# EAGLE board pcb final (EAGLE 9.7.0)
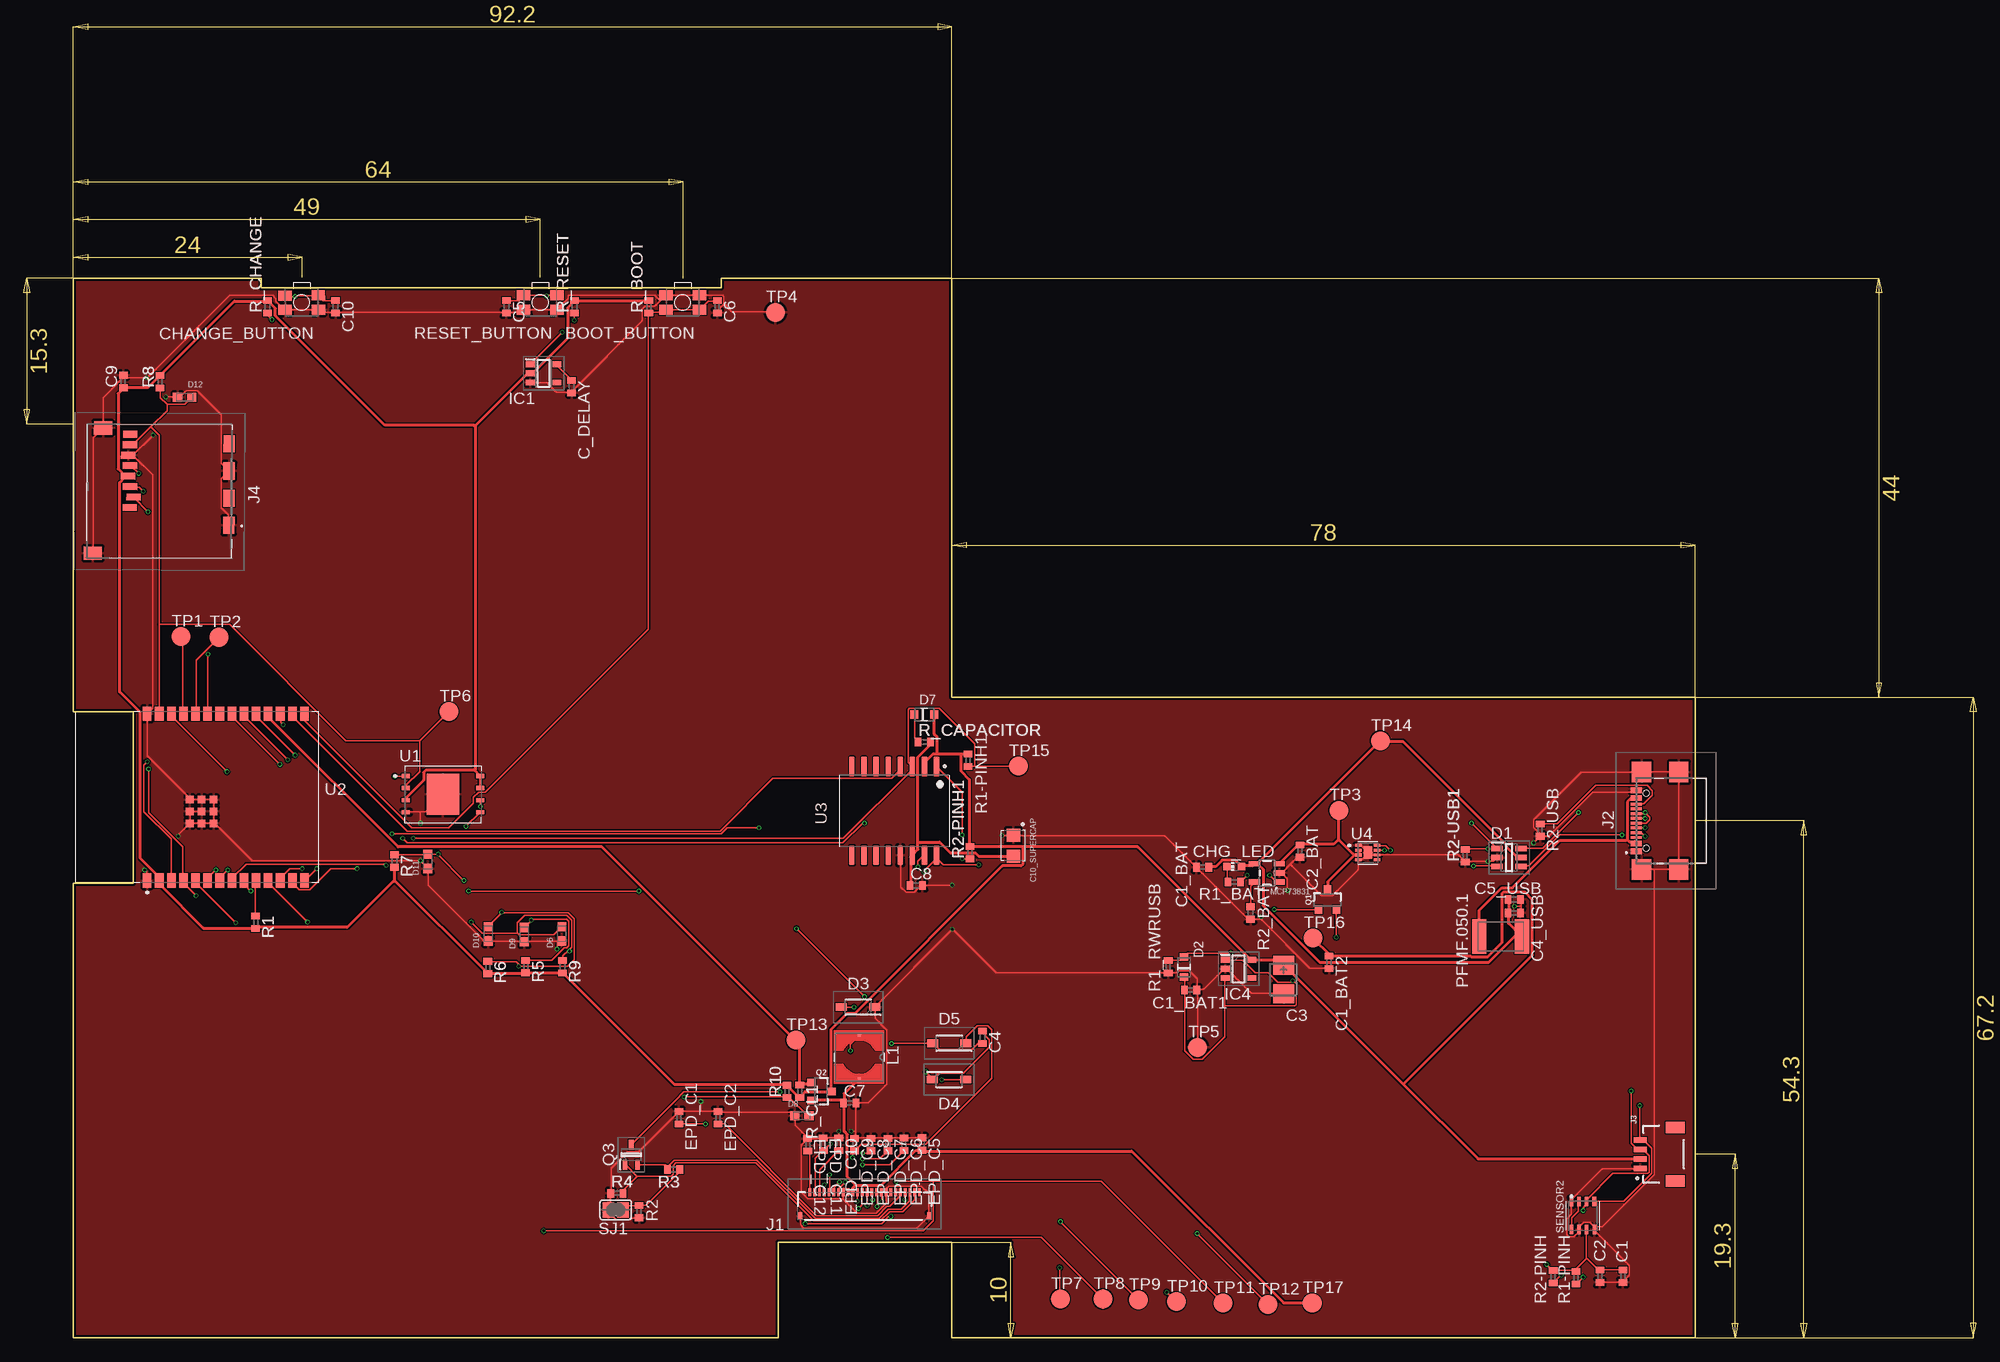
[diagram p0: board, top side]
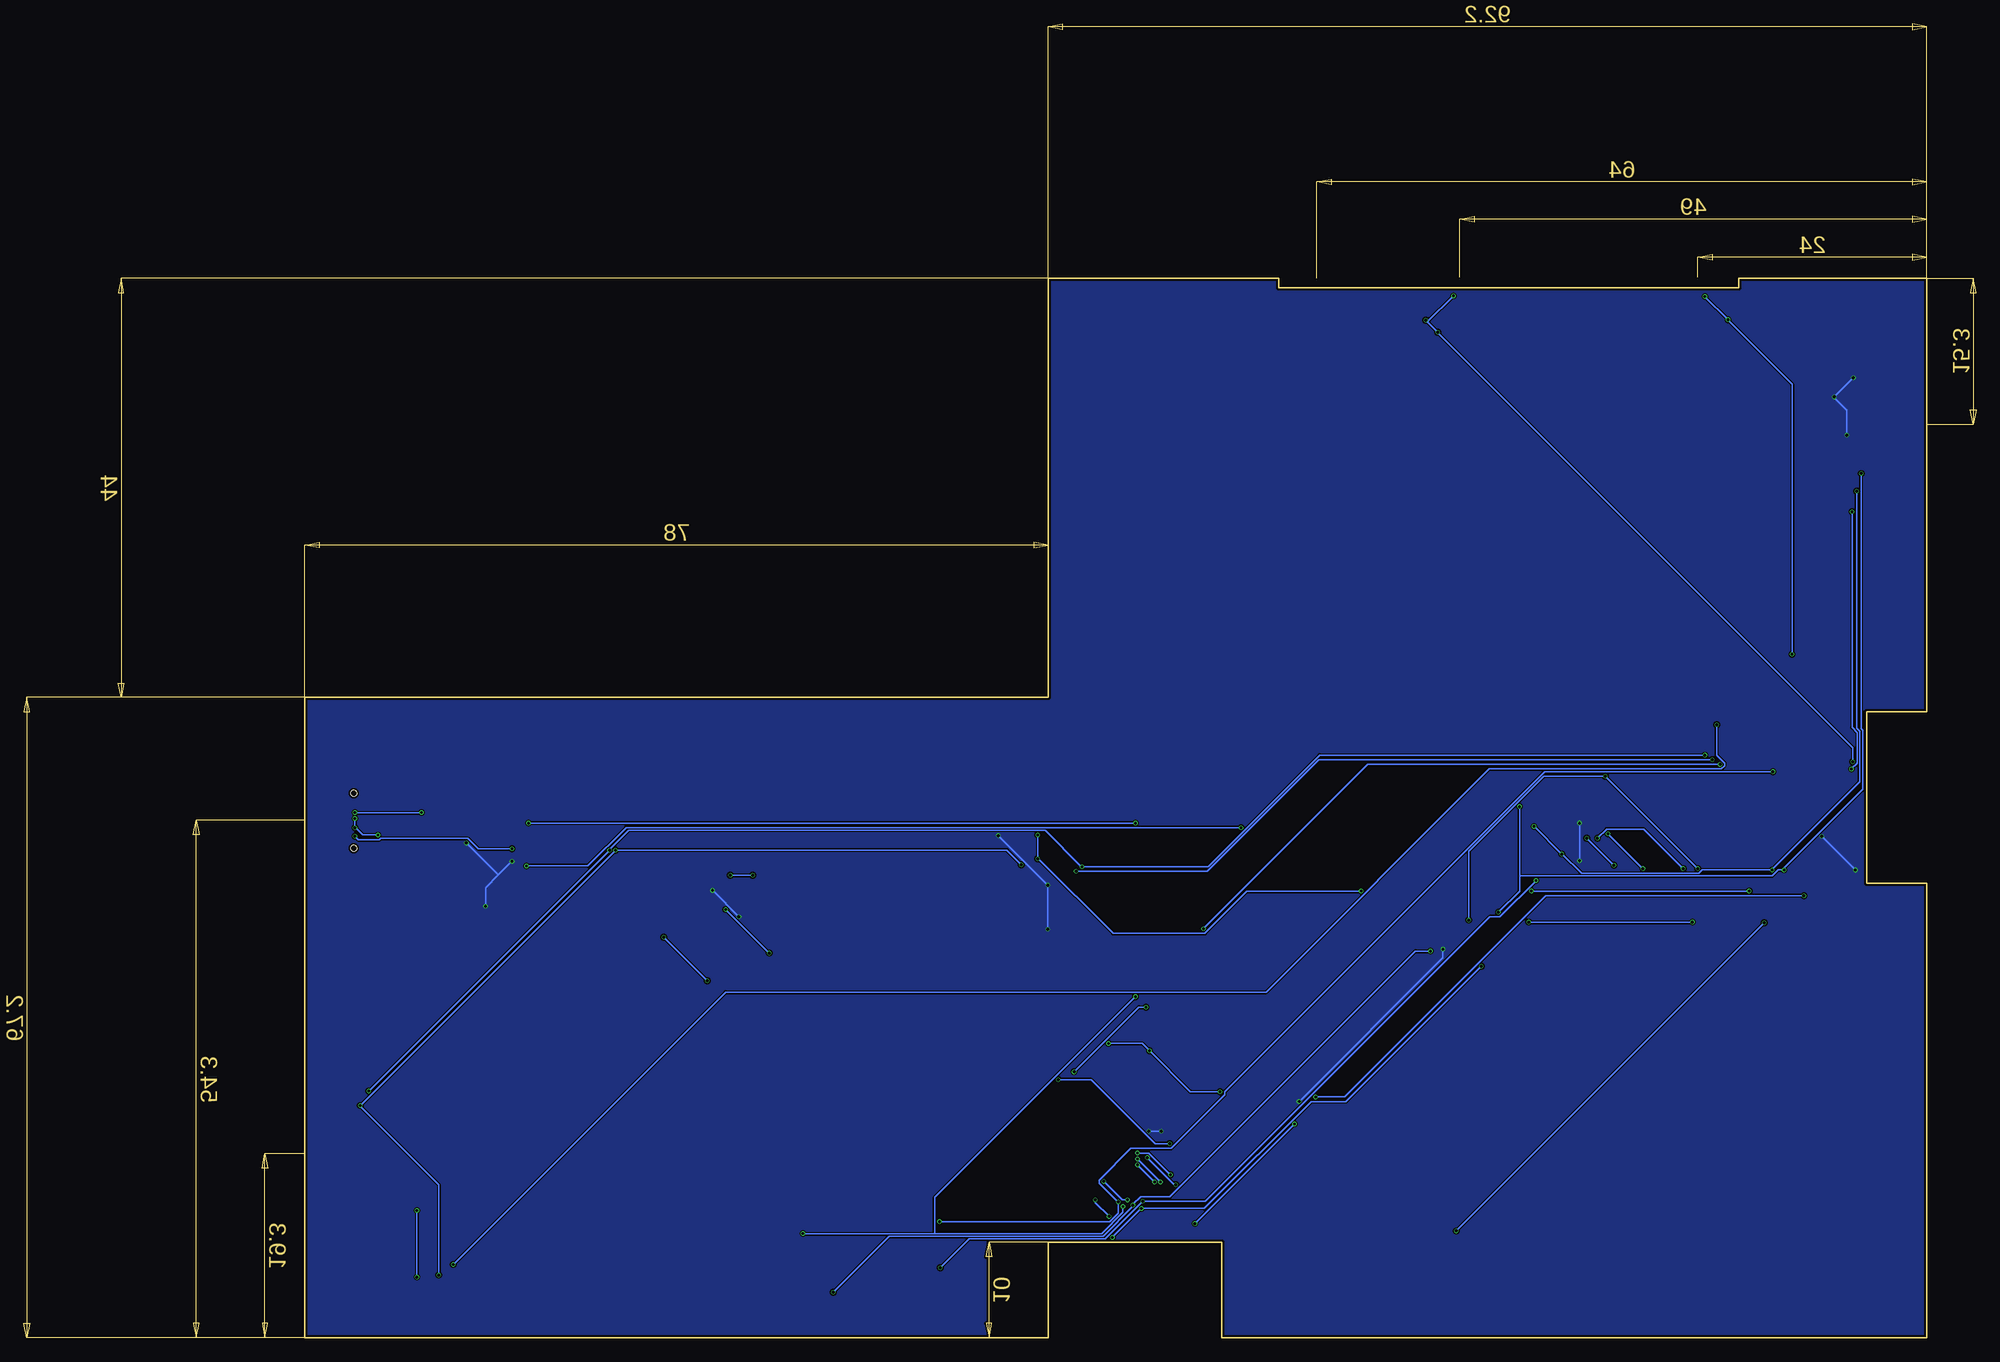
[diagram p1: board, bottom side, seen from below]

Size 170.2 x 111.2 mm. Coordinates in mm from the lower left corner, seen from the top.
Outline: 92.2,111.2 92.2,67.2 170.2,67.2 170.2,0 92.2,0 92.2,10 74,10 74,0 0,0 0,47.7 6.3,47.7 6.3,65.7 0,65.7 0,111.2 19.7,111.2 19.7,110.2 68,110.2 68,111.2 92.2,111.2
Copper layers (1*16): Top 0.035mm / dielectric 1.6mm / Bottom 0.035mm
Design rules "jlcpcb-2layers.dru": minimum track width 5mil, minimum drill 0.3mm, track to track 5mil, track to pad 5mil, pad to pad 5mil, via to via 5mil, smd to smd 5mil, copper to edge 0.2mm, drill to drill 6mil, minimum pad ring 10mil, minimum via ring 3mil, stop-mask expansion 4mil, vias tented up to drill 0mil, thermal gap 10mil
Net classes: 0 default: width 0.15 mm; 1 power nets: width 0.3 mm

## Footprints (pad centres in the part's own frame; a part is rotated, then mirrored left to right if it is on the bottom)
MYBUTTON = smd 1.4 x 1.05: 1 1.75,0.75; 2 -1.75,0.75; 3 -1.75,-0.75; 4 1.75,-0.75
EAGLE-LTSPICE_C0402 = smd 0.7 x 0.9: 1 -0.65,0; 2 0.65,0
RCL_CT3528 = smd 2 x 2.2: + -1.5,0; - 1.5,0
CAPCP3225X100N = smd 1.4 x 1.4: 1 -1.1,0; 2 1.1,0
ADAFRUIT_CHIP-LED0603 = smd 0.8 x 0.8: A 0,-0.75; C 0,0.75
SOT95P280X145-6N = smd 1.2 x 0.6: 1 -1.25,0.95; 2 -1.25,0; 3 -1.25,-0.95; 4 1.25,-0.95; 5 1.25,0; 6 1.25,0.95
ESP32_WROVER_AVX---SD0805S020S1R0_AVX_SD0805S020S1R0_0 = smd 0.8 x 0.9: 1 -1.05,0; 2 1.05,0
SOD3716X135N = smd 1.15 x 0.8: 1 -1.75,0; 2 1.75,0
DIOC1608X36N = smd 0.97 x 0.94: 1 -0.75,0; 2 0.75,0
SOT95P280X125-5N = smd 0.9 x 0.6: 1 -1.4,0.95; 2 -1.4,0; 3 -1.4,-0.95; 4 1.4,-0.95; 5 1.4,0.95
SOT95P280X120-5N = smd 0.9 x 0.6: 1 -1.4,0.95; 2 -1.4,0; 3 -1.4,-0.95; 4 1.4,-0.95; 5 1.4,0.95
FH34SRJ24S05SH99 = smd 0.3 x 0.8: 1 5.75,1.45; 2 5.25,1.45; 3 4.75,1.45; 4 4.25,1.45; 5 3.75,1.45; 6 3.25,1.45; 7 2.75,1.45; 8 2.25,1.45; 9 1.75,1.45; 10 1.25,1.45; 11 0.75,1.45; 12 0.25,1.45; 13 -0.25,1.45; 14 -0.75,1.45; 15 -1.25,1.45; 16 -1.75,1.45; 17 -2.25,1.45; 18 -2.75,1.45; 19 -3.25,1.45; 20 -3.75,1.45; 21 -4.25,1.45; 22 -4.75,1.45; 23 -5.25,1.45; 24 -5.75,1.45 | smd 0.4 x 0.8: MP1 6.75,-1.05; MP2 -6.75,-1.05
SAMACSYS_PARTS_USB4110GFA = smd 0.3 x 1.15: A1 -3.35,3.678; A4 -2.55,3.678; A5 -1.25,3.678; A6 -0.25,3.678; A7 0.25,3.678; A8 1.25,3.678; A9 2.55,3.678; A12 3.35,3.678; B1 3.05,3.678; B4 2.25,3.678; B5 1.75,3.678; B6 0.75,3.678; B7 -0.75,3.678; B8 -1.75,3.678; B9 -2.25,3.678; B12 -3.05,3.678 | smd 2.18 x 2: MP1 -5.11,-0.827; MP2 5.11,-0.827; MP3 -5.11,3.103; MP4 5.11,3.103 | hole 0.65: -2.89,2.603; 2.89,2.603
JST04_1MM_RA = smd 0.6 x 1.35: 1 -1.5,0; 2 -0.5,0; 3 0.5,0; 4 1.5,0 | smd 1.2 x 2: NC1 2.8,-3.675; NC2 -2.8,-3.675
112ATAARR03ATTEND = smd 1.8 x 1.2: G1 10.6,10.4; G2 4.9,10.4; S1 7.75,10.4; S2 2.05,10.4 | smd 1.4 x 1.9: G3 13.6,-3.85; G4 0.45,-2.85 | smd 0.7 x 1.5: P1 8.8,0; P2 7.7,0.4; P3 6.6,0; P4 5.5,-0.2; P5 4.4,0; P6 3.3,-0.2; P7 2.2,0; P8 1.1,0
IND_4828-WE-TPC_WRE = smd 0.33 x 0.33: 1 -2.286,0; 2 2.286,0
ESP32_WROVER_SPARKFUN-IC-POWER_SOT23-5 = smd 0.55 x 1.2: 1 -0.95,-1.3; 2 0,-1.3; 3 0.95,-1.3; 4 0.95,1.3; 5 -0.95,1.3
ESP32C6_VARISTOR_CT/CN1812 = smd 1.5 x 3.6: 1 -2.25,0; 2 2.25,0
ESP32_WROVER_SPARKFUN-DISCRETESEMI_SOT23-3 = smd 0.8 x 0.9: 1 -0.95,-1; 2 0.95,-1; 3 0,1.1
SOT65P210X110-3N = smd 1.05 x 0.5: 1 -1.05,0.65; 2 -1.05,-0.65; 3 1.05,0
ESP32_WROVER_EAGLE-LTSPICE_R0402 = smd 0.7 x 0.9: 1 -0.65,0; 2 0.65,0
ESP32_WROVER_BME680_PSON80P300X300X100-8N = smd 1.016 x 0.5: 1 1.458,1.2; 2 1.458,0.4; 3 1.458,-0.4; 4 1.458,-1.2; 5 -1.458,-1.22; 6 -1.458,-0.4; 7 -1.458,0.4; 8 -1.458,1.2
SJ = smd 1.168 x 1.6: 1 -0.762,0; 2 0.762,0
TP20R = smd 2 x 2: TP 0,0
SON127P600X800X80-9N = smd 0.94 x 0.44: 1 -3.895,1.905; 2 -3.895,0.635; 3 -3.895,-0.635; 4 -3.895,-1.905; 5 3.895,-1.905; 6 3.895,-0.635; 7 3.895,0.635; 8 3.895,1.905 | smd 3.4 x 4.3: 9 0,0
XCVR_ESP32-C6-WROOM-1-N8 = smd 1.5 x 0.9: 1 -8.75,5.26; 2 -8.75,3.99; 3 -8.75,2.72; 4 -8.75,1.45; 5 -8.75,0.18; 6 -8.75,-1.09; 7 -8.75,-2.36; 8 -8.75,-3.63; 9 -8.75,-4.9; 10 -8.75,-6.17; 11 -8.75,-7.44; 12 -8.75,-8.71; 13 -8.75,-9.98; 14 -8.75,-11.25; 15 8.75,-11.25; 16 8.75,-9.98; 17 8.75,-8.71; 18 8.75,-7.44; 19 8.75,-6.17; 20 8.75,-4.9; 21 8.75,-3.63; 22 8.75,-2.36; 23 8.75,-1.09; 24 8.75,0.18; 25 8.75,1.45; 26 8.75,2.72; 27 8.75,3.99; 28 8.75,5.26 | smd 0.8 x 0.8: 29_1 -2.755,0.79; 29_2 -1.505,0.79; 29_3 -0.255,0.79; 29_4 -2.755,-0.46; 29_5 -1.505,-0.46; 29_6 -0.255,-0.46; 29_7 -2.755,-1.71; 29_8 -1.505,-1.71; 29_9 -0.255,-1.71
SOIC127P1032X265-16N = smd 2.05 x 0.59: 1 -4.655,4.445; 2 -4.655,3.175; 3 -4.655,1.905; 4 -4.655,0.635; 5 -4.655,-0.635; 6 -4.655,-1.905; 7 -4.655,-3.175; 8 -4.655,-4.445; 9 4.655,-4.445; 10 4.655,-3.175; 11 4.655,-1.905; 12 4.655,-0.635; 13 4.655,0.635; 14 4.655,1.905; 15 4.655,3.175; 16 4.655,4.445
SON50P200X200X80-9N = smd 0.76 x 0.27: 1 -0.985,0.75; 4 -0.985,-0.75; 5 0.985,-0.75; 6 0.985,-0.25; 7 0.985,0.25; 8 0.985,0.75 | smd 0.76 x 0.3: 2 -0.985,0.25; 3 -0.985,-0.25 | smd 0.9 x 1.3: 9 0,0

## Placement (x,y rotation side)
BOOT_BUTTON  [MYBUTTON]  63.95,108.65 180 top
C1  100nF  [EAGLE-LTSPICE_C0402]  162.62,6.46 270 top
C1_BAT  4.7uF  [EAGLE-LTSPICE_C0402]  118.51,49.38 180 top
C1_BAT1  4.7uF  [EAGLE-LTSPICE_C0402]  117.25,36.52 0 top
C1_BAT2  4.7uF  [EAGLE-LTSPICE_C0402]  131.79,39.42 270 top
C2  100nF  [EAGLE-LTSPICE_C0402]  160.2,6.46 270 top
C2_BAT  4.7uF  [EAGLE-LTSPICE_C0402]  128.72,51.08 270 top
C3  100uF TANT  [RCL_CT3528]  127.01,37.6 270 top
C4  4.7uF/25V  [EAGLE-LTSPICE_C0402]  95.42,31.54 270 top
C4_USB  100nF  [EAGLE-LTSPICE_C0402]  151.22,44.6 0 top
C5  1uF  [EAGLE-LTSPICE_C0402]  45.45,108.21 270 top
C5_USB  4.7uF  [EAGLE-LTSPICE_C0402]  151.23,46 0 top
C6  100nF  [EAGLE-LTSPICE_C0402]  67.58,108.21 270 top
C7  10uF  [EAGLE-LTSPICE_C0402]  81.47,24.66 0 top
C8  100nF  [EAGLE-LTSPICE_C0402]  88.46,47.46 0 top
C9  100nF  [EAGLE-LTSPICE_C0402]  5.24,100.36 90 top
C10  100nF  [EAGLE-LTSPICE_C0402]  27.52,108.21 270 top
C10_SUPERCAP  CPH3225A  [CAPCP3225X100N]  98.65,51.64 270 top
C_DELAY  100nF  [EAGLE-LTSPICE_C0402]  52.29,99.82 270 top
CHANGE_BUTTON  BUTTON_CUSYOMV1  [MYBUTTON]  23.96,108.64 180.2 top
CHG_LED  [ADAFRUIT_CHIP-LED0603]  121.84,49.45 90 top
D1  USBLC6-2SC6Y  [SOT95P280X145-6N]  150.68,50.4 0 top
D2  SD0805S020S1R0  [ESP32_WROVER_AVX---SD0805S020S1R0_AVX_SD0805S020S1R0_0]  116.55,38.91 90 top
D3  MBR0530  [SOD3716X135N]  82.36,34.7 180 top
D4  MBR0530  [SOD3716X135N]  91.9,27.1 0 top
D5  MBR0530  [SOD3716X135N]  91.92,30.91 180 top
D6  PGB1010603MR  [DIOC1608X36N]  51.28,42.4 90 top
D7  ESP32_WROVER_AVX---SD0805S020S1R0_AVX_SD0805S020S1R0_0_0AVX_SD0805S020S1R0_0_0  [ESP32_WROVER_AVX---SD0805S020S1R0_AVX_SD0805S020S1R0_0]  89.3,65.41 0 top
D8  PGB1010603MR  [DIOC1608X36N]  76.46,23.3 0 top
D9  PGB1010603MR  [DIOC1608X36N]  47.34,42.3 90 top
D10  PGB1010603MR  [DIOC1608X36N]  43.52,42.4 90 top
D11  PGB1010603MR  [DIOC1608X36N]  37.2,50 90 top
D12  PGB1010603MR  [DIOC1608X36N]  11.68,98.7 0 top
EPD_C1  1uF/50V  [EAGLE-LTSPICE_C0402]  63.54,23.1 270 top
EPD_C2  1uF/50V  [EAGLE-LTSPICE_C0402]  67.65,23.1 270 top
EPD_C5  0.1uF/50V  [EAGLE-LTSPICE_C0402]  89.06,20.34 270 top
EPD_C6  1uF/50V  [EAGLE-LTSPICE_C0402]  87.16,20.3 270 top
EPD_C7  1uF/50V  [EAGLE-LTSPICE_C0402]  85.48,20.28 270 top
EPD_C8  1uF/50V  [EAGLE-LTSPICE_C0402]  83.69,20.28 270 top
EPD_C9  1uF/50V  [EAGLE-LTSPICE_C0402]  82,20.28 270 top
EPD_C10  1uF/50V  [EAGLE-LTSPICE_C0402]  80.33,20.32 270 top
EPD_C11  1uF/50V  [EAGLE-LTSPICE_C0402]  78.71,20.32 271.1 top
EPD_C12  1uF/50V  [EAGLE-LTSPICE_C0402]  77.07,20.25 270.4 top
IC1  BD5229G-TR  [SOT95P280X125-5N]  49.35,101.22 0 top
IC4  XC6220A331MR-G  [SOT95P280X120-5N]  122.29,38.72 0 top
J1  FH34SRJ-24S-0.5SH_99_  [FH34SRJ24S05SH99]  83.05,13.82 0 top
J2  SAMACSYS_PARTS_USB4110-GF-A  [SAMACSYS_PARTS_USB4110GFA]  167.68,54.26 90 top
J3  QWIIC_RIGHT_ANGLE  [JST04_1MM_RA]  164.43,19.26 90 top
J4  112A-TAAR-R03_ATTEND  [112ATAARR03ATTEND]  5.97,95.92 269.7 top
L1  68uH  [IND_4828-WE-TPC_WRE]  82.47,29.45 270 top
MCP73831  ESP32_WROVER_SPARKFUN-IC-POWER_MCP73831  [ESP32_WROVER_SPARKFUN-IC-POWER_SOT23-5]  125.26,48.79 90 top
PFMF.050.1  ESP32C6_VARISTORCN1812  [ESP32C6_VARISTOR_CT/CN1812]  149.79,42.1 0 top
Q1  20V/4.2A/52mΩ/1.4W  [ESP32_WROVER_SPARKFUN-DISCRETESEMI_SOT23-3]  131.61,45.96 0 top
Q2  20V/4.2A/52mΩ/1.4W  [ESP32_WROVER_SPARKFUN-DISCRETESEMI_SOT23-3]  78.48,25.86 270 top
Q3  SI1308EDL-T1-GE3  [SOT65P210X110-3N]  58.55,19.21 90 top
R1  10K  [ESP32_WROVER_EAGLE-LTSPICE_R0402]  19.13,43.61 270 top
R1-PINH  10K  [ESP32_WROVER_EAGLE-LTSPICE_R0402]  157.7,6.3 90 top
R1-PINH1  10K  [ESP32_WROVER_EAGLE-LTSPICE_R0402]  93.91,60.62 90 top
R1_BAT  200  [ESP32_WROVER_EAGLE-LTSPICE_R0402]  121.83,47.84 0 top
R1_RWRUSB  100K  [ESP32_WROVER_EAGLE-LTSPICE_R0402]  114.91,38.94 90 top
R2  2.2  [ESP32_WROVER_EAGLE-LTSPICE_R0402]  59.37,13.24 90 top
R2-PINH  10K  [ESP32_WROVER_EAGLE-LTSPICE_R0402]  155.31,6.4 90 top
R2-PINH1  10K  [ESP32_WROVER_EAGLE-LTSPICE_R0402]  94.09,50.92 90 top
R2-USB  5k1  [ESP32_WROVER_EAGLE-LTSPICE_R0402]  153.95,53.28 270 top
R2-USB1  5k1  [ESP32_WROVER_EAGLE-LTSPICE_R0402]  146.08,50.6 90 top
R2_BAT  2K  [ESP32_WROVER_EAGLE-LTSPICE_R0402]  123.54,44.58 90 top
R3  0.47  [ESP32_WROVER_EAGLE-LTSPICE_R0402]  62.99,17.66 180 top
R4  10K  [ESP32_WROVER_EAGLE-LTSPICE_R0402]  57.05,15.16 0 top
R5  10K  [ESP32_WROVER_EAGLE-LTSPICE_R0402]  47.47,38.96 270 top
R6  10K  [ESP32_WROVER_EAGLE-LTSPICE_R0402]  43.49,38.86 270 top
R7  10K  [ESP32_WROVER_EAGLE-LTSPICE_R0402]  33.69,50.04 270 top
R8  10K  [ESP32_WROVER_EAGLE-LTSPICE_R0402]  9.11,100.34 90 top
R9  10K  [ESP32_WROVER_EAGLE-LTSPICE_R0402]  51.33,38.94 270 top
R10  10K  [ESP32_WROVER_EAGLE-LTSPICE_R0402]  74.91,25.86 90 top
R_BOOT  10K  [ESP32_WROVER_EAGLE-LTSPICE_R0402]  60.39,108.21 90 top
R_CAPACITOR  15  [ESP32_WROVER_EAGLE-LTSPICE_R0402]  89.31,62.54 0 top
R_CHANGE  10K  [ESP32_WROVER_EAGLE-LTSPICE_R0402]  20.38,108.21 90 top
R_CL1  10K  [ESP32_WROVER_EAGLE-LTSPICE_R0402]  76.23,25.88 270 top
R_RESET  10K  [ESP32_WROVER_EAGLE-LTSPICE_R0402]  52.6,108.21 90 top
RESET_BUTTON  RESET_BUTTON  [MYBUTTON]  49,108.65 180 top
SENSOR2  BME688  [ESP32_WROVER_BME680_PSON80P300X300X100-8N]  158.42,12.82 90 top
SJ1  [SJ]  56.92,13.42 0 top
TP1  TPTP20R  [TP20R]  11.29,73.59 0 top
TP2  TPTP20R  [TP20R]  15.29,73.52 0 top
TP3  TPTP20R  [TP20R]  132.81,55.36 0 top
TP4  TPTP20R  [TP20R]  73.68,107.62 0 top
TP5  TPTP20R  [TP20R]  118,30.47 0 top
TP6  TPTP20R  [TP20R]  39.42,65.72 0 top
TP7  TPTP20R  [TP20R]  103.59,4.07 0 top
TP8  TPTP20R  [TP20R]  108.06,4.07 0 top
TP9  TPTP20R  [TP20R]  111.78,3.97 0 top
TP10  TPTP20R  [TP20R]  115.77,3.79 0 top
TP11  TPTP20R  [TP20R]  120.67,3.64 0 top
TP12  TPTP20R  [TP20R]  125.37,3.49 0 top
TP13  TPTP20R  [TP20R]  75.82,31.24 0 top
TP14  TPTP20R  [TP20R]  137.17,62.64 0 top
TP15  TPTP20R  [TP20R]  99.17,59.99 0 top
TP16  TPTP20R  [TP20R]  130.12,41.94 0 top
TP17  TPTP20R  [TP20R]  130.02,3.64 0 top
U1  W25Q512JVEIQ  [SON127P600X800X80-9N]  38.79,57.06 0 top
U2  ESP32-C6-WROOM-1-N8  [XCVR_ESP32-C6-WROOM-1-N8]  13,56.74 90 top
U3  DS3231SN#  [SOIC127P1032X265-16N]  86.15,55.3 270 top
U4  MAX17048G+T10  [SON50P200X200X80-9N]  135.85,50.92 0 top

## Library data of the parts
BOOT_BUTTON CHANGE_BUTTON CHG_LED PFMF.050.1 RESET_BUTTON SJ1 TP1-TP17 = DeskAssistant v19 v1
C1 C1_BAT C1_BAT1 C1_BAT2 C2 C2_BAT C4 C4_USB C5 C5_USB C6-C10 C_DELAY EPD_C1 EPD_C2 EPD_C5-EPD_C12 = DeskAssistant v19 v1; SPICEMODEL: NONE; SPICEPREFIX: C
C3 = DeskAssistant v19 v1; SPICEPREFIX: C
C10_SUPERCAP = DeskAssistant v19 v1; AVAILABILITY: Not in stock; CHECK_PRICES: https://www.snapeda.com/parts/CPH3225A/Seiko+Instruments/view-part/?ref=eda; DESCRIPTION: 11 mF (EDLC) Supercapacitor 3.3 V 1210 (3225 Metric) - -; MF: Seiko Instruments; MP: CPH3225A; PACKAGE: 1210 Seiko; PRICE: None; PURCHASE-URL: https://www.snapeda.com/api/url_track_click_mouser/?unipart_id=562593&manufacturer=Seiko Instruments&part_name=CPH3225A&search_term=None; SNAPEDA_LINK: https://www.snapeda.com/parts/CPH3225A/Seiko+Instruments/view-part/?ref=snap
D1 = DeskAssistant v19 v1; AVAILABILITY: In Stock; CHECK_PRICES: https://www.snapeda.com/parts/USBLC6-2SC6Y/STMicroelectronics/view-part/?ref=eda; DESCRIPTION: 17V Clamp 5A (8/20µs) Ipp Tvs Diode Surface Mount SOT-23-6; MF: STMicroelectronics; MP: USBLC6-2SC6Y; PACKAGE: SOT-23-6 STMicroelectronics; PRICE: None; SNAPEDA_LINK: https://www.snapeda.com/parts/USBLC6-2SC6Y/STMicroelectronics/view-part/?ref=snap
D2 = DeskAssistant v19 v1; ATTR: SD0805S020S1R0; CENTROID_NOT_SPECIFIED: No; DATASHEET: http://datasheets.avx.com/schottky.pdf; DIGIKEY_DESCRIPTION: DIODE SCHOTTKY 20V 1A 0805; DIGIKEY_PART_NUMBER: 478-7800-1-ND; LEAD_FREE: yes; MF: AVX; MOUSER_PART_NUMBER: 581-SD0805S020S1R0; PACKAGE: 0805 (2012 metric); PREFIX: D; ROHS: yes; TEMPERATURE_RANGE_HIGH: +125°C; TEMPERATURE_RANGE_LOW: -55°C
D3-D5 = DeskAssistant v19 v1; AVAILABILITY: In Stock; CHECK_PRICES: https://www.snapeda.com/parts/MBR0530/Onsemi/view-part/?ref=eda; DESCRIPTION: Diode Schottky 30 V 500mA Surface Mount SOD-123; MF: ON Semiconductor; MP: MBR0530; PACKAGE: SOD-123-2 ON Semiconductor; PRICE: None; PURCHASE-URL: https://www.snapeda.com/api/url_track_click_mouser/?unipart_id=179458&manufacturer=ON Semiconductor&part_name=MBR0530&search_term=None; SNAPEDA_LINK: https://www.snapeda.com/parts/MBR0530/Onsemi/view-part/?ref=snap
D6 D8-D12 = DeskAssistant v19 v1; AVAILABILITY: In Stock; CHECK_PRICES: https://www.snapeda.com/parts/PGB1010603MR/Littelfuse/view-part/?ref=eda; DESCRIPTION: 150V (Typ) Clamp - Ipp Tvs Diode Surface Mount 0603 (1608 Metric); MF: Littelfuse Inc.; MP: PGB1010603MR; PACKAGE: 0603 Littelfuse Inc.; PRICE: None; PURCHASE-URL: https://www.snapeda.com/api/url_track_click_mouser/?unipart_id=5659453&manufacturer=Littelfuse Inc.&part_name=PGB1010603MR&search_term=None; SNAPEDA_LINK: https://www.snapeda.com/parts/PGB1010603MR/Littelfuse/view-part/?ref=snap
D7 = DeskAssistant v19 v1; CENTROID_NOT_SPECIFIED: No; DATASHEET: http://datasheets.avx.com/schottky.pdf; DIGIKEY_DESCRIPTION: DIODE SCHOTTKY 20V 1A 0805; DIGIKEY_PART_NUMBER: 478-7800-1-ND; LEAD_FREE: yes; MF: AVX; MOUSER_PART_NUMBER: 581-SD0805S020S1R0; PACKAGE: 0805 (2012 metric); PREFIX: D; ROHS: yes; TEMPERATURE_RANGE_HIGH: +125°C; TEMPERATURE_RANGE_LOW: -55°C
IC1 = DeskAssistant v19 v1; DESCRIPTION: Voltage Detector with Adjustable Delay Time: CMOS processes are utilized to develop high precision, low current consumption CMOS reset ICs that allow arbitrary setting of the delay time. The extensive lineup includes both Nch Open Drain and CMOS output types in a wide range of detection voltages (from 2.3V to 6.0V, in 0.1V steps), enabling selection of the ideal solution based on customer requirements. In addition, the entire series is of course both lead-free and RoHS-compliant.; HEIGHT: 1.25mm; MANUFACTURER_NAME: ROHM Semiconductor; MANUFACTURER_PART_NUMBER: BD5229G-TR; MOUSER_PART_NUMBER: 755-BD5229G-TR; MOUSER_PRICE-STOCK: https://www.mouser.co.uk/ProductDetail/ROHM-Semiconductor/BD5229G-TR?qs=4kLU8WoGk0vvnhrrYwdszw%3D%3D
IC4 = DeskAssistant v19 v1; DESCRIPTION: LDO Voltage Regulators; HEIGHT: 1.2mm; MANUFACTURER_NAME: Torex; MANUFACTURER_PART_NUMBER: XC6220A331MR-G; MOUSER_PART_NUMBER: 865-XC6220A331MR-G; MOUSER_PRICE-STOCK: https://www.mouser.co.uk/ProductDetail/Torex-Semiconductor/XC6220A331MR-G?qs=AsjdqWjXhJ8ZSWznL1J0gg%3D%3D
J1 = DeskAssistant v19 v1; DESCRIPTION: 24 Position FFC, FPC Connector Contacts, Top and Bottom 0.020" (0.50mm) Surface Mount, Right Angle; HEIGHT: 1.1mm; MANUFACTURER_NAME: Hirose; MANUFACTURER_PART_NUMBER: FH34SRJ-24S-0.5SH(99); MOUSER_PART_NUMBER: 798-FH34SRJ24S05SH99; MOUSER_PRICE-STOCK: https://www.mouser.co.uk/ProductDetail/Hirose-Connector/FH34SRJ-24S-0.5SH99?qs=vcbW%252B4%252BSTIpKBl5ap9J8Fw%3D%3D
J2 = DeskAssistant v19 v1; DESCRIPTION: CONN USB 2.0 TYPE-C R/A SMT; HEIGHT: 3.26mm; MANUFACTURER_NAME: GCT (GLOBAL CONNECTOR TECHNOLOGY); MANUFACTURER_PART_NUMBER: USB4110-GF-A; MOUSER_PART_NUMBER: 640-USB4110-GF-A; MOUSER_PRICE-STOCK: https://www.mouser.co.uk/ProductDetail/GCT/USB4110-GF-A?qs=KUoIvG%2F9IlYiZvIXQjyJeA%3D%3D
J3 = DeskAssistant v19 v1; PROD_ID: CONN-13694
J4 = DeskAssistant v19 v1; DESCRIPTION: Micro SD Card Socket, Push-Push Type, Top Mount, SMT, H=1.83mm, 10u; HEIGHT: 1.9mm; MANUFACTURER_NAME: ATTEND; MANUFACTURER_PART_NUMBER: 112A-TAAR-R03 ATTEND
L1 = DeskAssistant v19 v1; COPYRIGHT: Copyright (C) 2024 Ultra Librarian. All rights reserved.; MANUFACTURER_PART_NUMBER: 744043680; MFR_NAME: Wurth Electronics
MCP73831 = DeskAssistant v19 v1; PROD_ID: IC-09995
Q1 = DeskAssistant v19 v1; ATTR: DMG2305UX-7; PROD_ID: TRAN-14388
Q2 = DeskAssistant v19 v1; PROD_ID: TRAN-14388
Q3 = DeskAssistant v19 v1; AVAILABILITY: In Stock; CHECK_PRICES: https://www.snapeda.com/parts/SI1308EDL-T1-GE3/Vishay+Siliconix/view-part/?ref=eda; DESCRIPTION: Si1308EDL-T1-GE3 N-channel MOSFET Transistor, 1.5 A, 30 V, 3-Pin SC-70 | Siliconix / Vishay SI1308EDL-T1-GE3; MF: Vishay Siliconix; MP: SI1308EDL-T1-GE3; PACKAGE: SOT-323 Vishay Semiconductor; PRICE: None; PURCHASE-URL: https://www.snapeda.com/api/url_track_click_mouser/?unipart_id=274603&manufacturer=Vishay Siliconix&part_name=SI1308EDL-T1-GE3&search_term=None; SNAPEDA_LINK: https://www.snapeda.com/parts/SI1308EDL-T1-GE3/Vishay+Siliconix/view-part/?ref=snap
R1 R1-PINH R1-PINH1 R1_BAT R1_RWRUSB R2 R2-PINH R2-PINH1 R2-USB R2-USB1 R2_BAT R3-R10 R_BOOT R_CAPACITOR R_CHANGE R_CL1 R_RESET = DeskAssistant v19 v1; SPICEMODEL: NONE; SPICEPREFIX: R
SENSOR2 = DeskAssistant v19 v1; AVAILABILITY: Unavailable; DESCRIPTION: Integrated Environmental Unit; MF: Bosch Sensortec; MP: BME680; PACKAGE: LGA-8 Bosch Tools; PRICE: None
U1 = DeskAssistant v19 v1; AVAILABILITY: In Stock; CHECK_PRICES: https://www.snapeda.com/parts/W25Q512JVEIQ/Winbond+Electronics/view-part/?ref=eda; DESCRIPTION: FLASH - NOR Memory IC 512Mb (64M x 8) SPI - Quad I/O 133 MHz 8-WSON (8x6); MF: Winbond Electronics; MP: W25Q512JVEIQ; PACKAGE: Package; PRICE: None; SNAPEDA_LINK: https://www.snapeda.com/parts/W25Q512JVEIQ/Winbond+Electronics/view-part/?ref=snap
U2 = DeskAssistant v19 v1; AVAILABILITY: In Stock; CHECK_PRICES: https://www.snapeda.com/parts/ESP32-C6-WROOM-1-N8/Espressif+Systems/view-part/?ref=eda; DESCRIPTION: Multiprotocol Modules ESP32-C6 module, Wi-Fi 6 in 2.4 GHz band, Bluetooth 5, Zigbee 3.0 and Thread. ESP34-WROOM Compatible - ENGINEERING SAMPLE; MF: Espressif Systems; MP: ESP32-C6-WROOM-1-N8; PACKAGE: None; PRICE: None; SNAPEDA_LINK: https://www.snapeda.com/parts/ESP32-C6-WROOM-1-N8/Espressif+Systems/view-part/?ref=snap
U3 = DeskAssistant v19 v1; AVAILABILITY: In Stock; CHECK_PRICES: https://www.snapeda.com/parts/DS3231SN%23/Analog+Devices/view-part/?ref=eda; DESCRIPTION: Extremely Accurate I²C-Integrated RTC/TCXO/Crystal; MF: Analog Devices; MP: DS3231SN#; PACKAGE: SOIC-16 Maxim; PRICE: None; PURCHASE-URL: https://www.snapeda.com/api/url_track_click_mouser/?unipart_id=99048&manufacturer=Analog Devices&part_name=DS3231SN#&search_term=None; SNAPEDA_LINK: https://www.snapeda.com/parts/DS3231SN%23/Analog+Devices/view-part/?ref=snap
U4 = DeskAssistant v19 v1; AVAILABILITY: In Stock; CHECK_PRICES: https://www.snapeda.com/parts/MAX17048G+T10/Analog+Devices/view-part/?ref=eda; DESCRIPTION: 3µA 1-Cell/2-Cell Fuel Gauge with ModelGauge; MF: Analog Devices; MP: MAX17048G+T10; PACKAGE: TDFN-8 Maxim; PRICE: None; PURCHASE-URL: https://www.snapeda.com/api/url_track_click_mouser/?unipart_id=329239&manufacturer=Analog Devices&part_name=MAX17048G+T10&search_term=None; SNAPEDA_LINK: https://www.snapeda.com/parts/MAX17048G+T10/Analog+Devices/view-part/?ref=snap

## Nets
3V3 [power nets]: C1_BAT2.1 C3.+ C9.1 D7.2 IC1.2 IC4.5 J3.2 J4.P4 Q2.3 R1-PINH1.2 R1.2 R2-PINH1.2 R5.2 R6.2 R7.2 R8.2 R9.2 R10.2 R_BOOT.2 R_CHANGE.2 R_CL1.2 R_RESET.2 TP16.TP U1.3 U1.7 U1.8 U2.2 U3.2
32KHZ: R2-PINH1.1 U2.9 U3.1
DN: D1.4 J2.A7 J2.B7
DP: D1.6 J2.A6 J2.B6
EPD_3V3 [power nets]: C7.1 EPD_C5.2 J1.15 J1.16 L1.2 Q2.2 TP17.TP
EPD_3V3_C [power nets]: Q2.1 R_CL1.1 TP13.TP U2.18
EPD_BUSY: J1.9 TP9.TP U2.26
EPD_CS: D6.2 J1.12 R9.1 TP10.TP U2.11
EPD_DC: J1.11 TP11.TP U2.5
EPD_RST: J1.10 TP12.TP U2.21
FLASH_CS: D9.2 R5.1 U1.1 U2.12
GDR: J1.2 Q3.1 R4.2
GND: BOOT_BUTTON.3 BOOT_BUTTON.4 C1.2 C1_BAT1.2 C1_BAT2.2 C1_BAT.2 C2.2 C2_BAT.2 C3.- C4_USB.2 C5.2 C5_USB.2 C6.2 C7.2 C8.2 C9.2 C10.2 C10_SUPERCAP.1 C_DELAY.2 CHANGE_BUTTON.1 CHANGE_BUTTON.2 D1.2 D3.1 D6.1 D8.1 D9.1 D10.1 D11.1 D12.1 EPD_C1.1 EPD_C2.1 EPD_C5.1 EPD_C6.1 EPD_C7.1 EPD_C8.1 EPD_C9.1 EPD_C10.1 EPD_C11.1 EPD_C12.1 IC1.3 IC4.2 J1.8 J1.17 J1.MP1 J1.MP2 J2.A1 J2.A12 J2.B1 J2.B12 J2.MP1 J2.MP2 J2.MP3 J2.MP4 J3.1 J4.G1 J4.G2 J4.G3 J4.G4 J4.P6 MCP73831.2 R1_RWRUSB.1 R2-USB1.1 R2-USB.2 R2.1 R2_BAT.1 R4.1 RESET_BUTTON.1 RESET_BUTTON.2 SENSOR2.1 SENSOR2.5 SENSOR2.7 SJ1.1 TP4.TP TP5.TP U1.4 U1.9 U2.1 U2.28 U2.29_1 U2.29_2 U2.29_3 U2.29_4 U2.29_5 U2.29_6 U2.29_7 U2.29_8 U2.29_9 U3.13 U4.1 U4.4 U4.6 U4.9
GPIO8: R1.1 U2.10
I2C_PW: C1.1 C2.1 R1-PINH.2 R2-PINH.2 SENSOR2.6 U2.17
INT_RTC: R1-PINH1.1 TP15.TP U2.8 U3.3
IO/BOOT: BOOT_BUTTON.1 BOOT_BUTTON.2 C6.1 R_BOOT.1 U2.15
IO/CHANGE: C10.1 CHANGE_BUTTON.3 CHANGE_BUTTON.4 R_CHANGE.1 U2.23
MISO: D12.2 J4.P7 R8.1 TP6.TP U1.2 U2.27
MOSI: D11.2 J1.14 J4.P3 R7.1 TP7.TP U1.5 U2.7
N$1: J2.A5 R2-USB1.2
N$4: J2.B5 R2-USB.1
N$7: SENSOR2.2 SENSOR2.8
N$10: C1_BAT1.1 D2.1 IC4.1 IC4.3 Q1.2
N$11: D2.2 Q1.1 R1_RWRUSB.2
N$12: C4.1 D3.2 D4.1
N$13: MCP73831.1 R1_BAT.2
N$14: CHG_LED.C R1_BAT.1
N$15: MCP73831.5 R2_BAT.2
N$16: EPD_C2.2 J1.5
N$17: EPD_C12.2 J1.24
N$18: EPD_C1.2 J1.4
N$20: EPD_C10.2 J1.22
N$22: EPD_C8.2 J1.20
N$23: EPD_C7.2 J1.19
N$24: EPD_C6.2 J1.18
N$27: C_DELAY.1 IC1.5
N$32: D7.1 R_CAPACITOR.1
PREVGH: D5.1 EPD_C9.2 J1.21
PREVGL: D4.2 EPD_C11.2 J1.23
RESE: J1.3 Q3.2 R3.2
RESE': R2.2 R3.1 SJ1.2
RESET: C5.1 IC1.1 R_RESET.1 RESET_BUTTON.3 RESET_BUTTON.4 U2.3
RTC_RST: U2.16 U3.4
RX: TP2.TP U2.24
SCK: D10.2 J1.13 J4.P5 R6.1 TP8.TP U1.6 U2.6
SCL: J3.4 R2-PINH.1 SENSOR2.4 U2.20 U3.16 U4.7
SDA: J3.3 R1-PINH.1 SENSOR2.3 U2.19 U3.15 U4.8
SRC: C4.2 D5.2 L1.1 Q3.3
SS_SD: D8.2 J4.P2 R10.1 U2.4
TX: TP1.TP U2.25
USB_D+: D1.1 U2.14
USB_D-: D1.3 U2.13
VBAT [power nets]: C2_BAT.1 MCP73831.3 Q1.3 TP3.TP U4.2 U4.3
VBUS [power nets]: C1_BAT.1 C4_USB.1 C5_USB.1 CHG_LED.A D1.5 MCP73831.4 PFMF.050.1.2 TP14.TP
VRTC [power nets]: C8.1 C10_SUPERCAP.2 R_CAPACITOR.2 U3.14
VUSB [power nets]: J2.A4 J2.A9 J2.B4 J2.B9 PFMF.050.1.1

## Tracks (layer width: path | path; a pad name or v marks a point on that pad's centre or on a via)
3V3
  Top 0.3: 42.1,59.55 36.98,59.55 36.77,59.35 36.77,58.52 34.9,56.65 34.9,56.44 U1.3 | 42.1,59.55 42.66,59 U1.8 42.73,58.86 42.73,57.76 U1.7 | R_BOOT.2 52.7,108.86 R_RESET.2 52.56,108.79 51.87,108.1 51.87,104.91 48.2,101.24 47.99,101.24 IC1.2 47.85,101.11 47.58,101.11 42.17,95.7 | 42.17,95.7 42.17,59.69 42.1,59.55 | 42.17,95.7 42.03,95.77 32.69,95.77 21.19,107.27 21.19,108.03 20.5,108.72 R_CHANGE.2 20.36,108.79 16.9,108.79 9.21,101.11 R8.2 9.07,100.97 7.83,99.72 5.26,99.72 C9.1 5.19,99.58 4.71,99.1 4.71,91.2 5.47,90.44 5.68,90.44 J4.P4 5.4,90.3 4.85,89.75 4.85,67.8 6.99,65.65 6.99,50.34 9,48.34 9,48.13 U2.2 9.07,47.92 9.07,47.58 13.64,43 19.11,43 R1.2 19.25,43.07 28.74,43.07 33.59,47.92 33.73,47.99 | 33.73,47.99 33.73,49.38 R7.2 | 33.73,47.99 43.42,38.3 R6.2 43.56,38.23 47.37,38.23 47.44,38.3 R5.2 47.58,38.3 51.31,38.3 R9.2 51.45,38.23 63.09,26.59 74.79,26.59 R10.2 74.93,26.45 76.17,25.21 R_CL1.2 76.31,25.35 76.8,25.83 79.57,25.83 Q2.3 79.5,25.97 79.5,32.34 81.16,34 81.99,34 97.5,49.51 99.44,49.51 99.65,49.72 99.65,51.52 | 90.65,61.29 90.23,61.29 89.33,60.39 89.33,59.97 U3.2 | 90.65,61.29 93.14,61.29 | 93.14,61.29 93.9,61.29 R1-PINH1.2 | 93.14,61.29 93.14,59.49 94.04,58.59 94.04,51.59 R2-PINH1.2 94.18,51.52 99.65,51.52 | 90.65,61.29 90.65,63.09 90.37,63.36 90.37,65.37 D7.2 | TP16.TP 130.12,41.9 131.78,40.23 131.78,40.1 C1_BAT2.1 131.92,40.03 146.67,40.03 146.74,39.96 148.4,39.96 149.93,41.48 149.93,46.6 150.06,46.74 152.35,46.74 153.11,45.98 153.11,40.16 139.57,26.63 | 139.57,26.63 127.14,39.06 C3.+ 127,39.13 126.52,39.61 123.75,39.61 IC4.5 123.54,39.68 111.7,51.52 99.65,51.52
  Top 0.3: 139.57,26.63 147.43,18.77 164.4,18.77 J3.2
32KHZ  (via drill 0.3)
  Top 0.15: v93.28,50.28 94.04,50.28 R2-PINH1.1 | v93.28,52.77 93.28,57.27 90.65,59.9 U3.1 | v18.63,46.88 17.94,47.58 17.94,47.92 U2.9 | v59.35,46.88 v41.48,46.88
  Bottom 0.15: v93.28,52.77 v93.28,50.28 93.21,50.28 85.39,42.45 75.76,42.45 71.33,46.88 v59.35,46.88 | v41.48,46.88 v18.63,46.88
DN  (via drill 0.3)
  Top 0.15: v164.95,53.53 164.05,53.53 J2.B7 | v164.95,54.5 164.05,54.5 J2.A7 | v162.53,52.77 156.02,52.77 152.77,49.51 151.94,49.51 D1.4
  Bottom 0.15: v164.95,54.5 v164.95,53.53 164.88,53.53 164.12,52.77 v162.53,52.77
DP  (via drill 0.3)
  Top 0.15: 164.95,54.98 164.05,54.98 J2.B6 | 164.95,54.98 165.09,54.98 165.44,54.64 165.44,54.36 165.09,54.02 164.05,54.02 J2.A6 | v157.96,55.12 154.22,51.38 151.94,51.38 D1.6 | v164.95,55.12 164.95,54.98
  Bottom 0.15: v164.95,55.12 v157.96,55.12
EPD_3V3
  Top 0.3: C7.1 80.88,24.72 80.88,25.62 82.41,27.15 L1.2 | Q2.2 77.49,24.93 80.75,24.93 C7.1 | J1.16 81.37,15.3 81.78,15.3 J1.15 81.85,15.44 81.85,15.79 82.06,16 | 82.06,16 84.76,16 88.43,19.67 89.06,19.67 EPD_C5.2 89.19,19.6 111.08,19.6 127,3.67 129.98,3.67 TP17.TP | C7.1 80.88,24.52 80.88,21.68 81.23,21.33 81.23,16.9 81.99,16.14 82.06,16
EPD_3V3_C
  Top 0.3: Q2.1 77.42,26.8 77.21,26.59 76.24,26.59 R_CL1.1 76.17,26.73 76.17,30.89 TP13.TP 75.69,31.3 55.47,51.52 34.07,51.52 20.5,65.09 20.5,65.44 U2.18
EPD_BUSY  (via drill 0.3)
  Top 0.15: v84.83,14.27 84.83,15.23 J1.9 | v103.6,12.19 111.77,4.02 TP9.TP | v16.14,59.42 10.32,65.23 10.32,65.44 U2.26
  Bottom 0.15: v103.6,12.19 85.73,12.19 84.83,13.09 v84.83,14.27 84.9,14.27 86.84,16.2 86.84,16.55 83.52,19.88 79.29,19.88 73.68,25.48 73.68,25.83 40.1,59.42 v16.14,59.42
EPD_CS  (via drill 0.3)
  Top 0.15: 51.97,40.68 52.28,41 52.28,43.84 51.8,44.32 47.37,44.32 46.6,43.56 46.6,42.52 | 51.97,40.68 51.38,40.1 51.38,39.61 R9.1 | 46.6,42.52 46.81,42.31 50.41,42.31 51.24,43.14 D6.2 | v24.58,43.63 20.5,47.71 20.5,47.92 U2.11 | v41.76,43.63 42.94,42.45 46.6,42.45 46.6,42.52 | v83.31,13.92 83.31,15.23 J1.12 | v114.75,4.78 115.72,3.81 TP10.TP | v52.08,40.58 51.97,40.68
  Bottom 0.15: v41.76,43.63 v24.58,43.63 | v114.75,4.78 108.86,10.66 86.42,10.66 83.31,13.78 v83.31,13.92 83.31,13.99 82.48,14.82 79.43,14.82 53.67,40.58 v52.08,40.58
EPD_DC  (via drill 0.3)
  Top 0.15: v83.86,14.47 83.86,15.23 J1.11 | 90.23,16.41 107.89,16.41 120.63,3.67 TP11.TP | 90.23,16.41 v86.36,16.41 | v17.04,43.56 12.88,47.71 12.88,47.92 U2.5 | v49.38,11.22 89.19,11.22 90.23,12.26 90.23,16.41
  Bottom 0.15: v83.86,14.47 84.42,14.47 v86.36,16.41 | v49.38,11.22 v17.04,43.56
EPD_RST  (via drill 0.3)
  Top 0.15: v84.35,13.78 84.35,15.23 J1.10 | v117.93,10.94 125.34,3.53 TP12.TP | v21.68,60.18 16.69,65.16 16.69,65.44 U2.21 | v83.03,35.8 v75.9,42.94
  Bottom 0.15: v84.35,13.78 84.35,13.16 86.56,10.94 104.08,10.94 | v117.93,10.94 104.08,10.94 | v21.68,60.18 58.66,60.18 v75.9,42.94 | v83.03,35.8 104.08,14.75 104.08,10.94
FLASH_CS  (via drill 0.3)
  Top 0.15: 48.09,43.8 47.37,43.07 D9.2 | 48.09,43.8 48.2,43.9 51.8,43.9 52.01,43.7 52.01,41.13 51.8,40.93 51.52,40.93 50.21,39.61 47.51,39.61 R5.1 | v33.73,58.93 34.83,58.93 U1.1 | v24.03,49.24 22.71,49.24 21.74,48.27 21.74,47.99 U2.12 | v48.06,43.84 48.09,43.8
  Bottom 0.15: v24.03,49.24 v33.73,58.93 40.16,58.93 48.06,51.04 v48.06,43.84
GDR
  Top 0.15: 59.14,16.97 62.74,16.97 62.95,17.17 62.95,18.07 63.23,18.35 71.61,18.35 77.7,12.26 84.69,12.26 85.66,13.23 87.05,13.23 88.29,14.47 88.29,15.23 J1.2 | 59.14,16.97 57.96,18.14 Q3.1 | R4.2 57.76,15.17 57.76,15.51 59.14,16.9 59.14,16.97
GND  (via drill 0.3)
  Top 0.15: 36.42,55.19 36.98,55.19 38.78,56.99 U1.9 | 36.42,55.19 34.9,55.19 U1.4 | 50.76,41.62 47.37,41.62 D9.1 47.3,41.55 47.23,41.62 43.56,41.62 D10.1 43.49,41.69 43.07,41.69 37.26,47.51 37.26,49.24 D11.1 37.19,49.31 v36.42,50.07 18.77,50.07 14.82,54.02 U2.29_7 | 50.76,41.62 51.24,41.62 D6.1 | v36.42,54.02 36.42,55.19 | U2.29_7 14.75,54.02 14.75,55.19 U2.29_8 14.75,55.26 14.75,56.44 U2.29_9 14.68,56.51 13.5,56.51 U2.29_6 13.43,56.51 12.26,56.51 U2.29_3 12.26,56.58 7.76,61.08 7.76,65.44 U2.28 7.76,65.51 8.31,66.06 8.31,90.58 6.3,92.59 5.82,92.59 J4.P6 6.3,92.66 v8.38,94.73 | U2.29_1 12.26,54.02 12.26,55.19 U2.29_2 12.33,55.19 13.43,55.19 U2.29_5 | U2.29_1 12.33,54.02 13.43,54.02 U2.29_4 13.5,54.02 14.68,54.02 U2.29_7 | v7.48,49.1 7.69,48.89 7.69,47.99 U2.1 | v11.01,52.63 11.01,52.77 12.19,53.95 U2.29_1 | J4.G1 16.27,85.32 16.27,86.36 15.51,87.12 15.51,90.16 16.27,90.92 J4.G2 16.27,91 15.51,91.76 15.51,96.88 13.02,99.37 11.84,99.37 11.22,98.75 10.94,98.75 D12.1 10.87,98.75 v9.7,98.75 | J4.G3 2.08,82.41 2.08,94.46 3.05,95.43 J4.G4 3.12,98.68 5.19,100.76 5.19,100.97 C9.2 5.26,100.76 v7.69,100.76 7.76,100.76 16.41,109.42 20.91,109.42 21.26,109.07 21.26,108.79 22.16,107.89 CHANGE_BUTTON.1 22.23,107.89 25.69,107.89 CHANGE_BUTTON.2 25.76,107.89 26.04,107.61 27.49,107.61 C10.2 27.56,107.61 45.43,107.61 C5.2 45.5,107.61 46.95,107.61 47.23,107.89 RESET_BUTTON.1 47.3,107.89 50.69,107.89 RESET_BUTTON.2 50.76,107.96 51.45,108.65 51.52,108.65 51.94,109.07 51.94,109.35 52.01,109.42 61.01,109.42 61.6,108.83 | IC1.3 47.99,100.2 49.72,100.2 50.69,99.23 52.28,99.23 C_DELAY.2 52.28,99.31 59.69,106.71 59.69,107.96 59.97,108.24 61.01,108.24 61.6,108.83
  Top 0.15: 68.28,108.44 67.59,107.75 67.59,107.61 C6.2 | 68.28,108.44 68.28,109.28 68.14,109.42 65.72,109.42 BOOT_BUTTON.3 65.65,109.42 62.26,109.42 BOOT_BUTTON.4 62.19,109.42 61.6,108.83 | TP4.TP 73.61,107.68 69.11,107.68 68.35,108.44 68.28,108.44 | 127.73,49.69 126.87,48.82 126.59,48.82 MCP73831.2 126.87,48.75 127.42,48.2 v127.42,46.95 | 127.73,49.69 128.46,50.41 128.67,50.41 C2_BAT.2 | U4.9 135.8,50.9 135.8,50.76 135.25,50.21 134.9,50.21 U4.4 134.83,50.14 134.83,49.1 132.13,46.4 131.02,46.4 127.73,49.69 | U4.9 135.8,50.69 136.77,50.69 U4.6 136.91,50.69 145.36,50.69 146.05,50 R2-USB1.1 146.12,50 v148.47,50 149.03,50 149.37,50.34 D1.2 | U4.1 134.9,51.66 135.18,51.66 135.87,50.97 U4.9 | 151.94,45.29 151.94,45.98 C5_USB.2 | 151.94,45.29 151.94,44.67 C4_USB.2 | v151.24,45.29 151.94,45.29 | C2.2 160.24,5.82 162.6,5.82 C1.2 162.6,5.89 163.29,6.58 163.29,7.62 159.62,11.29 SENSOR2.5 | SENSOR2.5 159.62,11.43 159.62,11.63 159.14,12.12 158.51,12.12 158.03,11.63 158.03,11.43 SENSOR2.7 158.03,11.29 158.03,11.15 157.47,10.6 156.92,10.6 156.71,10.8 156.71,12.46 157.2,12.95 157.2,14.27 SENSOR2.1 157.27,14.34 157.27,14.54 160.45,17.73 164.4,17.73 J3.1 | R2-USB.2 154.84,52.63 159.48,57.27 163.98,57.27 J2.B1 163.98,57.34 163.98,57.55 J2.A12 | J2.B12 163.98,51.18 163.98,50.97 J2.A1 164.05,50.9 164.05,49.65 164.54,49.17 J2.MP3 164.61,49.17 165.92,49.17 | 165.92,49.17 168.49,49.17 J2.MP1 168.49,49.24 168.49,59.35 J2.MP2 168.49,59.42 164.61,59.42 J2.MP4 164.54,59.35 158.24,59.35 153.25,54.36 153.25,53.53 153.94,52.84 153.94,52.7 R2-USB.2 | 165.92,49.17 165.92,17.11 160.45,11.63 159.69,11.63 SENSOR2.5
  Top 0.15: v153.25,51.94 R2-USB.2 | 80.81,14.61 80.81,14.54 82.27,13.09 84.28,13.09 85.32,14.13 85.32,15.23 J1.8 85.32,15.3 85.32,15.65 85.59,15.93 88.99,15.93 89.75,15.17 89.75,12.81 J1.MP1 89.75,12.74 88.5,11.49 76.66,11.49 76.31,11.84 76.31,12.74 J1.MP2 | 80.81,14.61 80.81,15.23 J1.17 | R2.1 59.35,12.53 58.52,12.53 58.38,12.4 56.99,12.4 56.16,13.23 56.16,13.37 SJ1.1 56.16,13.43 56.37,13.64 56.37,15.1 R4.1 56.44,15.17 56.44,17.8 58.17,19.53 59.35,19.53 63.5,23.68 EPD_C1.1 63.57,23.75 65.86,23.75 | 65.86,23.75 67.59,23.75 EPD_C2.1 67.66,23.68 75.34,23.68 75.69,23.34 D8.1 75.76,23.27 75.76,22.3 77.08,20.98 EPD_C12.1 | EPD_C12.1 77.08,20.91 78.67,20.91 EPD_C11.1 78.74,20.98 80.33,20.98 EPD_C10.1 v80.33,21.68 | 80.81,14.61 77.08,14.61 76.38,15.3 76.38,20.22 77.01,20.84 EPD_C12.1 | C1_BAT1.2 117.93,36.56 118.62,36.56 120.84,38.78 IC4.2 120.91,38.71 121.05,38.71 123.61,36.15 127,36.15 C3.- | C1_BAT1.2 117.93,36.63 117.93,37.67 117.1,38.5 115.99,38.5 115.79,38.3 114.95,38.3 R1_RWRUSB.1 114.89,38.3 96.88,38.3 92.31,42.87 v92.24,42.87 84.14,34.76 D3.1 84.14,34.69 84.14,33.52 85.39,32.27 85.39,26.59 83.45,24.65 82.2,24.65 C7.2 82.13,21.68 | TP5.TP 118,36.49 C1_BAT1.2 | EPD_C5.1 87.19,20.98 EPD_C6.1 87.12,20.98 85.52,20.98 EPD_C7.1 85.45,20.98 83.72,20.98 EPD_C8.1 83.65,20.98 82.06,20.98 EPD_C9.1 82.13,21.05 82.13,21.68 | U3.13 86.84,50.62 86.84,47.3 87.39,46.74 88.22,46.74 88.92,47.44 89.06,47.44 C8.2 89.12,47.51 v92.24,47.51 | 124.65,43.9 129.77,38.78 C1_BAT2.2 | 124.65,43.9 123.61,43.9 R2_BAT.1 123.47,43.97 123.27,43.97 C1_BAT.2 117.79,49.44 114.54,52.7 98.68,52.7 C10_SUPERCAP.1 98.61,52.7 v97.44,52.7
  Top 0.15: 82.13,21.68 v81.65,21.68 | 124.65,43.9 v124.65,44.18 | v50.76,40.79 50.76,41.62 | 65.86,23.75 v65.86,24.79
  Bottom 0.15: v36.42,50.07 v36.42,54.02 | v11.01,52.63 v7.48,49.1 | v7.69,100.76 v9.7,98.75 9.7,98.68 8.38,97.36 v8.38,94.73 | v151.24,45.29 151.24,47.23 149.89,48.58 | v148.47,50 149.89,48.58 | v153.25,51.94 149.89,48.58 | v97.44,52.7 v92.24,47.51 v92.24,42.87 | v81.65,21.68 v80.33,21.68 | v124.65,44.18 v127.42,46.95 | v50.76,40.79 50.76,39.89 v65.86,24.79
  pour Top: 6.36,47.66 6.34,47.64 6.32,47.62 0.08,47.62 0.08,0.08 73.92,0.08 73.92,10.02 73.94,10.04 73.96,10.06 73.98,10.08 92.22,10.08 92.24,10.06 92.26,10.04 92.28,10.02 92.28,0.08 170.12,0.08 170.12,67.12 92.18,67.12 92.16,67.14 92.14,67.16 92.12,67.18 92.12,111.12 68.08,111.12 68.08,110.18 68.06,110.16 68.04,110.14 68.02,110.12 19.68,110.12 19.66,110.14 19.64,110.16 19.62,110.18 19.62,111.12 0.08,111.12 0.08,65.78 6.32,65.78 6.34,65.76 6.36,65.74 6.38,65.72 6.38,47.68
  pour Bottom: 6.36,47.66 6.34,47.64 6.32,47.62 0.08,47.62 0.08,0.08 73.92,0.08 73.92,10.02 73.94,10.04 73.96,10.06 73.98,10.08 92.22,10.08 92.24,10.06 92.26,10.04 92.28,10.02 92.28,0.08 170.12,0.08 170.12,67.12 92.18,67.12 92.16,67.14 92.14,67.16 92.12,67.18 92.12,111.12 68.08,111.12 68.08,110.18 68.06,110.16 68.04,110.14 68.02,110.12 19.68,110.12 19.66,110.14 19.64,110.16 19.62,110.18 19.62,111.12 0.08,111.12 0.08,65.78 6.32,65.78 6.34,65.76 6.36,65.74 6.38,65.72 6.38,47.68
GPIO8
  Top 0.15: R1.1 19.11,44.32 19.11,47.92 U2.10
I2C_PW  (via drill 0.3)
  Top 0.15: C1.1 162.6,7.13 160.24,7.13 C2.1 160.18,7.13 160.04,7.13 158.86,8.31 158.79,8.31 | 158.79,8.31 158.79,11.36 SENSOR2.6 | 158.79,8.31 157.61,7.13 R1-PINH.2 157.68,6.99 157.61,7.06 155.33,7.06 R2-PINH.2 155.26,7.06 v154.63,7.69 | v22.02,64.33 21.74,64.61 21.74,65.44 U2.17
  Bottom 0.15: v22.02,64.33 22.02,61.15 21.19,60.32 21.19,60.04 21.54,59.69 45.91,59.69 69.32,36.29 126.03,36.29 v154.63,7.69
INT_RTC  (via drill 0.3)
  Top 0.15: 94.6,59.97 99.17,59.97 TP15.TP | 94.6,59.97 93.97,59.97 R1-PINH1.1 | v32.83,49.58 32.69,49.72 18.14,49.72 16.69,48.27 16.69,47.99 U2.8 | v35.66,52.42 80.81,52.42 88.02,59.62 88.02,59.9 U3.3 88.02,59.97 87.6,60.39 87.6,65.93 87.74,66.06 90.86,66.06 94.6,62.33 94.6,59.97
  Bottom 0.15: v35.66,52.42 v32.83,49.58
IO/BOOT
  Top 0.15: C6.1 67.52,108.79 66.62,108.79 65.72,107.89 BOOT_BUTTON.2 65.65,107.89 62.26,107.89 BOOT_BUTTON.1 62.19,107.89 61.91,107.61 60.45,107.61 R_BOOT.1 60.32,107.55 60.32,74.37 43.21,57.27 42.52,57.27 41.97,56.72 41.97,56.09 39.4,53.53 35.52,53.53 24.31,64.75 24.31,65.44 U2.15
IO/CHANGE  (via drill 0.3)
  Top 0.15: C10.1 27.49,108.86 26.25,108.86 25.76,109.35 CHANGE_BUTTON.3 25.69,109.35 23.27,109.35 v23.27,109.28 22.3,109.28 22.23,109.35 CHANGE_BUTTON.4 | v20.84,106.85 20.43,107.27 20.43,107.55 R_CHANGE.1 | v14.13,71.74 14.13,65.51 U2.23
  Bottom 0.15: v23.27,109.28 v20.84,106.85 20.84,106.78 14.13,100.07 v14.13,71.74
MISO
  Top 0.15: 36.36,62.67 36.36,59.42 34.9,57.96 34.9,57.76 U1.2 | 36.36,62.67 39.4,65.72 TP6.TP | 9.83,97.99 9.14,98.68 9.14,99.65 R8.1 | 9.83,97.99 11.7,97.99 12.4,98.68 D12.2 | 8.14,95.6 9.83,97.3 9.83,97.99 | 8.14,95.6 6.3,93.76 5.96,93.76 J4.P7 | 9,74.86 9,94.73 8.14,95.6 | 9,74.86 9,65.51 U2.27 | 36.36,62.67 28.6,62.67 16.41,74.86 9,74.86
MOSI  (via drill 0.3)
  Top 0.15: v82.27,14.34 82.27,15.23 J1.14 | v103.53,7.34 103.53,4.09 TP7.TP | R7.1 33.73,50.69 37.19,50.69 D11.2 37.26,50.76 v38.3,50.76 38.3,50.69 v41,47.99 | v41.2,53.67 42.66,55.12 U1.5 | v16.2,49.1 15.37,48.27 15.37,47.99 U2.7 | v7.34,88.85 6.92,89.26 5.96,89.26 J4.P3
  Bottom 0.15: v103.53,7.34 100.48,10.39 86.22,10.39 v82.27,14.34 75.69,14.34 45.84,44.18 44.8,44.18 v41,47.99 | v41.2,53.67 v38.3,50.76 38.23,50.76 36.22,48.75 23.89,48.75 23.55,49.1 v16.2,49.1 16.2,49.17 6.99,58.38 6.99,63.64 7.34,63.99 v7.34,88.85
N$1  (via drill 0.3)
  Top 0.15: v148.47,51.31 146.12,51.31 R2-USB1.2 | v164.95,52.63 164.61,52.98 164.05,52.98 J2.A5
  Bottom 0.15: v148.47,51.31 152,51.31 153.11,52.42 162.25,52.42 162.39,52.28 164.61,52.28 v164.95,52.63
N$4
  Top 0.15: R2-USB.1 154.01,53.95 155.74,53.95 159.76,57.96 165.16,57.96 165.72,57.41 165.72,56.92 164.81,56.02 164.05,56.02 J2.B5
N$7
  Top 0.15: SENSOR2.8 157.27,11.43 157.27,12.6 157.96,13.3 157.96,14.27 SENSOR2.2
N$10  (via drill 0.3)
  Top 0.15: D2.1 116.62,37.81 116.62,36.56 C1_BAT1.1 116.62,36.49 116.62,30.12 117.52,29.22 118.49,29.22 120.84,31.58 120.84,34.83 | 120.84,34.83 120.84,37.74 IC4.3 | 127.97,37.33 128.18,37.33 128.32,37.19 128.32,34.97 128.18,34.83 120.84,34.83 | 127.97,37.33 126.38,37.33 125.41,38.3 124.03,38.3 122.71,39.61 120.91,39.61 IC4.1 | v132.54,42.03 132.54,44.94 Q1.2 | v127.97,37.46 127.97,37.33
  Bottom 0.15: v127.97,37.46 v132.54,42.03
N$11  (via drill 0.3)
  Top 0.15: R1_RWRUSB.2 114.95,39.61 116.2,39.61 D2.2 116.62,40.03 116.96,40.37 v121.47,40.37 | v126.03,44.94 130.61,44.94 Q1.1
  Bottom 0.15: v121.47,40.37 v126.03,44.94
N$12  (via drill 0.3)
  Top 0.15: C4.1 95.43,32.13 95.43,31.99 96.12,31.3 96.12,30.47 93.42,27.77 90.79,27.77 90.16,27.15 D4.1 90.16,27.21 v89.47,27.91 | v81.92,34.69 80.68,34.69 D3.2
  Bottom 0.15: v81.92,34.69 82.68,34.69 v89.47,27.91
N$13  (via drill 0.3)
  Top 0.15: v123.2,48.54 122.5,47.85 R1_BAT.2 | v125.55,48.54 126.24,47.85 126.52,47.85 MCP73831.1
  Bottom 0.15: v125.55,48.54 v123.2,48.54
N$14
  Top 0.15: CHG_LED.C 121.12,49.44 121.12,47.85 R1_BAT.1
N$15
  Top 0.15: R2_BAT.2 123.54,45.29 123.54,47.37 123.96,47.78 MCP73831.5
N$16
  Top 0.15: J1.5 86.77,15.23 86.77,14.89 85.66,13.78 85.39,13.78 84.42,12.81 77.97,12.81 68.35,22.44 67.66,22.44 EPD_C2.2
N$17
  Top 0.15: J1.24 77.28,15.3 77.28,19.39 EPD_C12.2
N$18  (via drill 0.3)
  Top 0.15: v87.25,14.47 87.25,15.23 J1.4 | v85.8,12.74 85.59,12.74 84.83,11.98 v76.8,11.98 | v66.34,22.44 63.57,22.44 EPD_C1.2
  Bottom 0.15: v87.25,14.47 87.25,14.2 v85.8,12.74 | v66.34,22.44 v76.8,11.98
N$20
  Top 0.15: J1.22 78.32,15.3 78.32,17.66 EPD_C10.2
N$22  (via drill 0.3)
  Top 0.15: v79.36,17.11 79.36,15.3 J1.20 | v82.82,19.39 83.45,19.39 83.65,19.6 EPD_C8.2
  Bottom 0.15: v79.36,17.11 81.65,19.39 v82.82,19.39
N$23  (via drill 0.3)
  Top 0.15: v80.4,16.34 79.84,15.79 79.84,15.3 J1.19 | v82.82,18.77 84.62,18.77 85.45,19.6 EPD_C7.2
  Bottom 0.15: v82.82,18.77 v80.4,16.34
N$24  (via drill 0.3)
  Top 0.15: v81.02,16.34 80.33,15.65 80.33,15.3 J1.18 | v82.82,18.14 85.66,18.14 87.12,19.6 EPD_C6.2
  Bottom 0.15: v82.82,18.14 v81.02,16.34
N$27
  Top 0.15: IC1.5 50.76,102.14 50.76,102 52.28,100.48 C_DELAY.1
N$32
  Top 0.15: D7.1 88.29,65.37 88.29,62.95 88.64,62.6 R_CAPACITOR.1
PREVGH  (via drill 0.3)
  Top 0.15: v78.81,16.07 78.81,15.3 J1.21 | v81.78,18.91 81.78,19.39 81.99,19.6 EPD_C9.2 82.06,19.67 82.68,20.29 89.47,20.29 96.4,27.21 96.4,32.34 95.98,32.76 94.87,32.76 93.69,31.58 93.69,30.95 D5.1
  Bottom 0.15: v78.81,16.07 78.94,16.07 v81.78,18.91
PREVGL  (via drill 0.3)
  Top 0.15: J1.23 77.84,15.3 77.84,18.84 78.67,19.67 EPD_C11.2 78.74,19.67 v79.43,20.36 | v91.13,27.08 93.63,27.08 D4.2
  Bottom 0.15: v91.13,27.08 87.67,27.08 80.95,20.36 v79.43,20.36
RESE
  Top 0.15: J1.3 87.74,15.23 87.74,14.34 86.91,13.5 85.52,13.5 84.55,12.53 77.84,12.53 71.74,18.63 63.09,18.63 62.39,17.94 62.39,17.73 R3.2 62.33,17.94 62.12,18.14 59.21,18.14 Q3.2
RESE'
  Top 0.15: SJ1.2 57.69,13.43 58.1,13.85 59.35,13.85 R2.2 59.42,13.92 60.11,13.92 63.57,17.38 63.57,17.66 R3.1
RESET  (via drill 0.3)
  Top 0.15: C5.1 45.5,108.86 46.74,108.86 47.23,109.35 RESET_BUTTON.4 47.3,109.42 49.65,109.42 | 49.65,109.42 50.69,109.42 RESET_BUTTON.3 | v51.31,105.54 47.99,102.21 IC1.1 | v52.56,106.78 52.56,107.55 R_RESET.1 | v7.76,60.45 7.41,60.11 7.41,55.19 10.25,52.35 10.25,47.99 U2.3 | v49.65,109.35 49.65,109.42
  Bottom 0.15: v52.56,106.78 52.39,106.61 | 52.39,106.61 v51.31,105.54 51.31,105.47 7.76,61.91 v7.76,60.45 | 52.39,106.61 v49.65,109.35
RTC_RST
  Top 0.15: U2.16 22.99,65.44 22.99,65.23 35.04,53.18 67.86,53.18 73.41,58.72 85.87,58.72 86.77,59.62 86.77,59.9 U3.4
RX
  Top 0.15: U2.24 12.88,65.51 12.88,71.12 15.23,73.47 TP2.TP
SCK  (via drill 0.3)
  Top 0.15: v82.41,13.57 82.75,13.92 82.75,15.23 J1.13 | v85.45,10.53 101.59,10.53 108.03,4.09 TP8.TP | 46.85,39.09 46.95,38.99 51.87,38.99 52.56,39.68 52.56,43.97 51.94,44.6 44.94,44.6 | 46.85,39.09 46.47,39.47 43.56,39.47 R6.1 | 44.94,44.6 43.56,43.21 D10.2 | v42.73,55.75 42.73,56.37 U1.6 | v44.94,44.67 44.94,44.6 | v14.96,49.1 14.13,48.27 14.13,47.99 U2.6 | v6.86,90.72 6.09,91.48 5.96,91.48 J4.P5 | 46.85,39.09 v46.74,38.99
  Bottom 0.15: v85.45,10.53 v82.41,13.57 75.83,13.57 64.61,24.79 60.94,24.79 v46.74,38.99 | 42.73,48.48 42.73,46.88 v44.94,44.67 | 42.73,48.48 v42.73,55.75 | 42.73,48.48 16.2,48.48 15.58,49.1 v14.96,49.1 15.1,49.17 6.72,57.55 6.72,63.78 6.86,63.92 v6.86,90.72
SCL  (via drill 0.3)
  Top 0.15: v137.6,51.18 U4.7 | v164.4,24.38 164.4,20.77 J3.4 164.47,20.71 164.81,20.71 165.65,19.88 165.65,17.24 162.74,14.34 159.62,14.34 SENSOR2.4 | v156.16,6.58 156.09,6.58 155.33,5.82 R2-PINH.1 | v22.51,60.66 17.94,65.23 17.94,65.44 U2.20 | v89.26,48.96 90.58,50.28 90.58,50.62 U3.16 90.65,50.28 91.27,49.65 v95.01,49.65
  Bottom 0.15: v156.16,6.58 156.16,16.07 164.4,24.31 v164.4,24.38 v137.6,51.18 96.53,51.18 v95.01,49.65 | v22.51,60.66 63.78,60.66 75.48,48.96 v89.26,48.96
SDA  (via drill 0.3)
  Top 0.15: v158.44,6.37 157.75,5.68 R1-PINH.1 | v158.44,13.37 158.44,13.64 158.79,13.99 158.79,14.27 SENSOR2.3 158.86,14.34 158.86,14.54 161.56,17.24 165.23,17.24 165.37,17.38 165.37,19.11 164.75,19.74 164.47,19.74 J3.3 164.4,19.8 164.12,19.8 163.5,20.43 v163.5,25.9 | v138.22,51.18 137.74,51.66 U4.8 | v23.27,61.15 19.18,65.23 19.18,65.44 U2.19 | v88.64,49.44 88.64,50 89.26,50.62 U3.15
  Bottom 0.15: v158.44,13.37 v158.44,6.37 | v163.5,25.9 v138.22,51.18 138.22,51.24 136.22,53.25 92.52,53.25 88.71,49.44 v88.64,49.44 75.41,49.44 63.71,61.15 v23.27,61.15
SRC  (via drill 0.3)
  Top 0.15: C4.2 95.36,30.89 94.94,30.89 94.32,30.26 90.86,30.26 90.23,30.89 D5.2 90.16,30.89 v85.87,30.89 | v74.17,25.83 64.06,25.83 63.64,25.41 63.64,25.35 58.59,20.29 Q3.3 | L1.1 81.55,30.82 v81.55,30.12
  Bottom 0.15: v74.17,25.83 77.27,25.83 v81.55,30.12 82.32,30.89 v85.87,30.89
SS_SD  (via drill 0.3)
  Top 0.15: D8.2 77.14,23.34 77.01,23.34 75.14,25.21 74.93,25.21 R10.1 74.86,25.28 v64.13,25.28 | v7.89,59.69 7.89,55.12 11.49,51.52 11.49,47.99 U2.4 11.56,47.92 11.56,47.71 v12.88,46.4 | v7.83,86.7 6.37,88.16 J4.P2
  Bottom 0.15: v7.89,59.69 7.27,60.32 7.27,63.5 7.83,64.06 v7.83,86.7 | v64.13,25.28 61.08,25.28 39.96,46.4 v12.88,46.4
TX
  Top 0.15: U2.25 11.49,65.51 11.49,73.41 11.36,73.54 TP1.TP
USB_D+  (via drill 0.3)
  Top 0.15: v146.74,54.02 149.37,51.38 D1.1 | v83.03,54.02 82.82,54.02 80.75,51.94 35.04,51.94 v34.56,52.42 | v25.55,49.24 24.31,47.99 U2.14
  Bottom 0.15: v83.03,54.02 v146.74,54.02 | v34.56,52.42 33.59,53.39 29.71,53.39 v25.55,49.24
USB_D-  (via drill 0.3)
  Top 0.15: v146.95,49.51 149.37,49.51 D1.3 | v71.95,53.53 68.63,53.53 68,52.91 v33.45,52.91 | v29.78,49.24 27.01,49.24 24.79,47.02 23.68,47.02 22.99,47.71 22.99,47.92 U2.13
  Bottom 0.15: v146.95,49.51 140.51,49.51 136.49,53.53 v71.95,53.53 | v29.78,49.24 v33.45,52.91
VBAT
  Top 0.3: MCP73831.3 126.59,49.79 128.53,51.73 128.67,51.73 C2_BAT.1 128.81,51.8 132.27,51.8 132.68,52.22 132.82,52.28 | U4.2 134.9,51.11 134.9,50.69 U4.3 134.76,50.62 134.41,50.62 | 134.41,50.62 131.64,47.85 131.64,47.09 Q1.3 | 132.82,52.28 132.82,55.33 TP3.TP | 132.82,52.28 134.34,50.76 134.41,50.62
VBUS
  Top 0.3: C5_USB.1 150.62,45.98 150.62,44.67 C4_USB.1 150.62,44.46 150.62,43.49 152,42.1 PFMF.050.1.2 151.52,42.38 148.54,39.4 130.81,39.4 124.86,45.36 124.86,49.17 124.37,49.65 MCP73831.4 | MCP73831.4 123.96,49.72 123.75,49.51 122.64,49.51 CHG_LED.A 122.5,49.58 121.95,50.14 120.56,50.14 119.87,49.44 119.18,49.44 C1_BAT.1 | D1.5 151.87,50.41 151.52,50.41 150.34,51.59 150.34,51.8 139.54,62.6 137.18,62.6 TP14.TP 137.05,62.53 124.3,49.79 124.1,49.79 MCP73831.4
VRTC
  Top 0.3: C8.1 87.88,47.51 87.88,50.48 88.02,50.62 U3.14 88.16,50.76 88.64,51.24 88.64,52.01 | 88.64,52.01 88.64,60.94 89.96,62.26 R_CAPACITOR.2 | 88.64,52.01 90.92,52.01 92.03,50.9 94.67,50.9 95.01,50.55 98.61,50.55 C10_SUPERCAP.2
VUSB
  Top 0.3: J2.A4 163.98,51.73 163.98,52.01 J2.B9 163.84,52.08 163.29,52.08 163.08,52.28 | J2.A9 163.98,56.78 163.98,56.58 J2.B4 163.84,56.51 163.36,56.51 163.08,56.23 163.08,52.28 | 163.08,52.28 162.94,52.22 156.02,52.22 151.03,47.23 149.93,47.23 147.57,44.87 147.57,42.1 PFMF.050.1.1
(copper drawn outside any net)
  shapes: Top area x1